# Altium PCB pcb.PcbDoc
Units mm, origin at the board's own origin, x right, y up, seen from the top; angles counter-clockwise.
Board outline 55 x 85 mm, 2 copper layers (Top Layer, Bottom Layer); 31 components, 57 nets, 234 pads, 0 vias.
Unrouted connection lines stored in the file: 116.
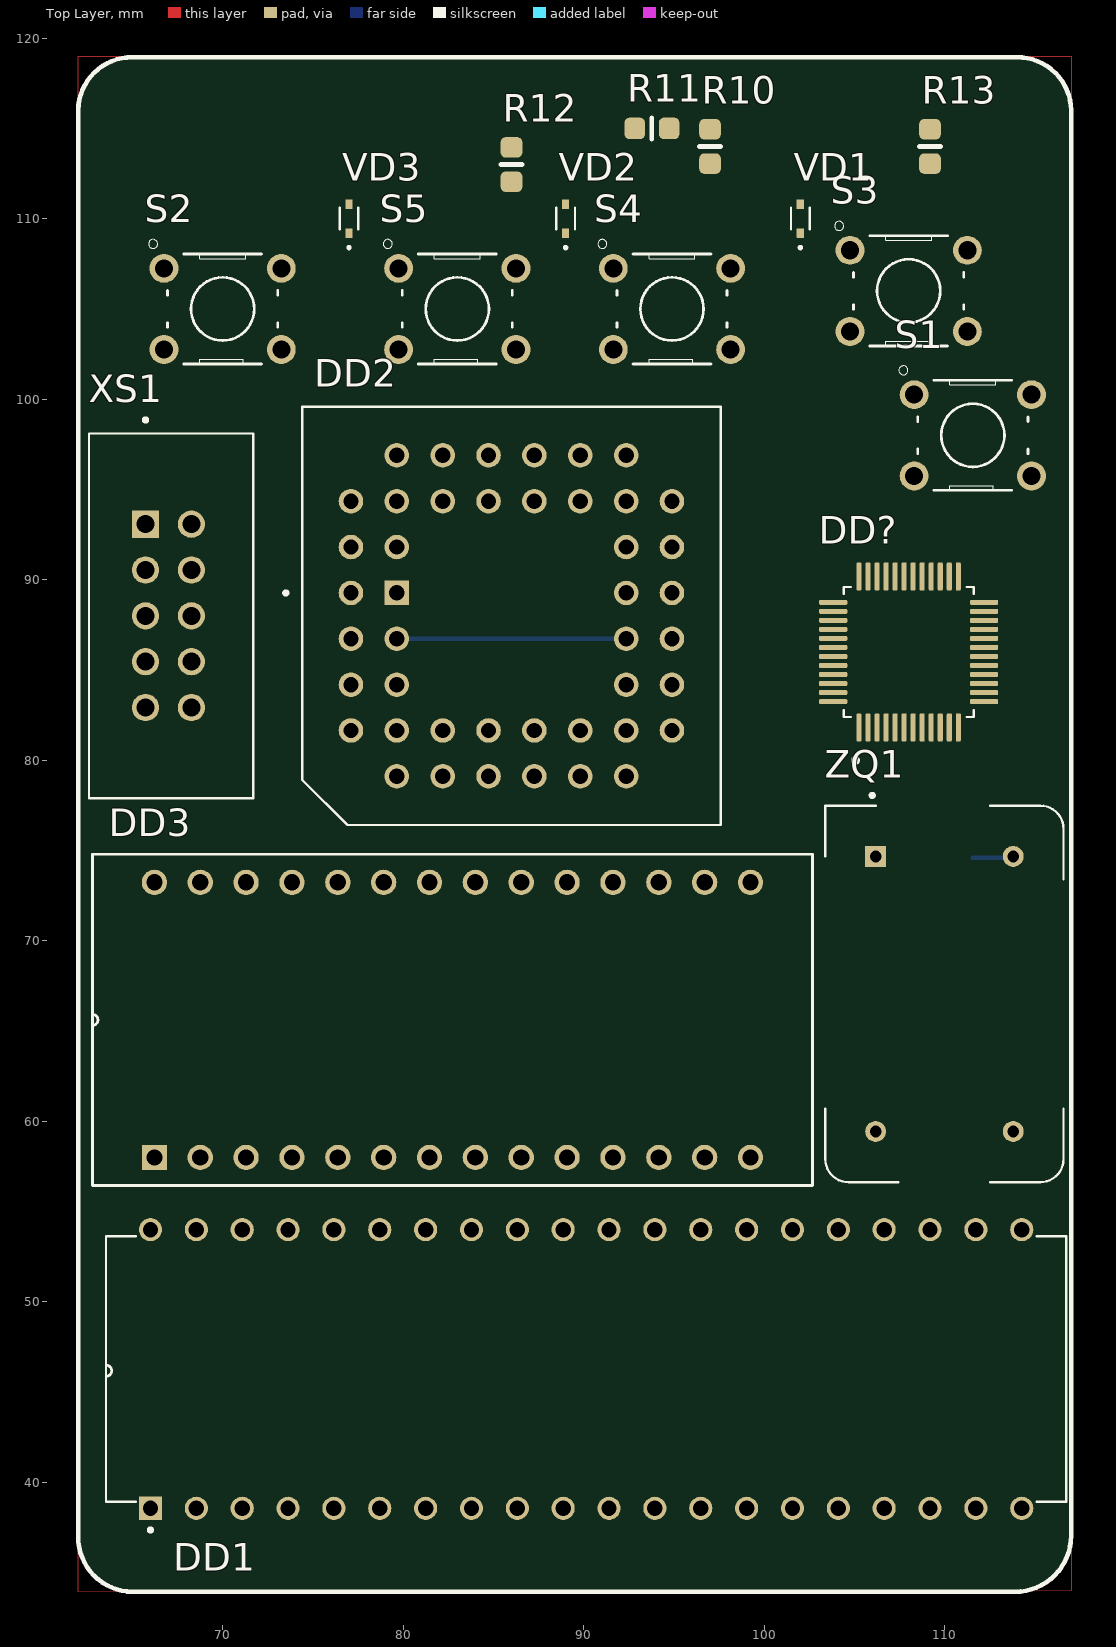
[diagram p0: Top Layer view]
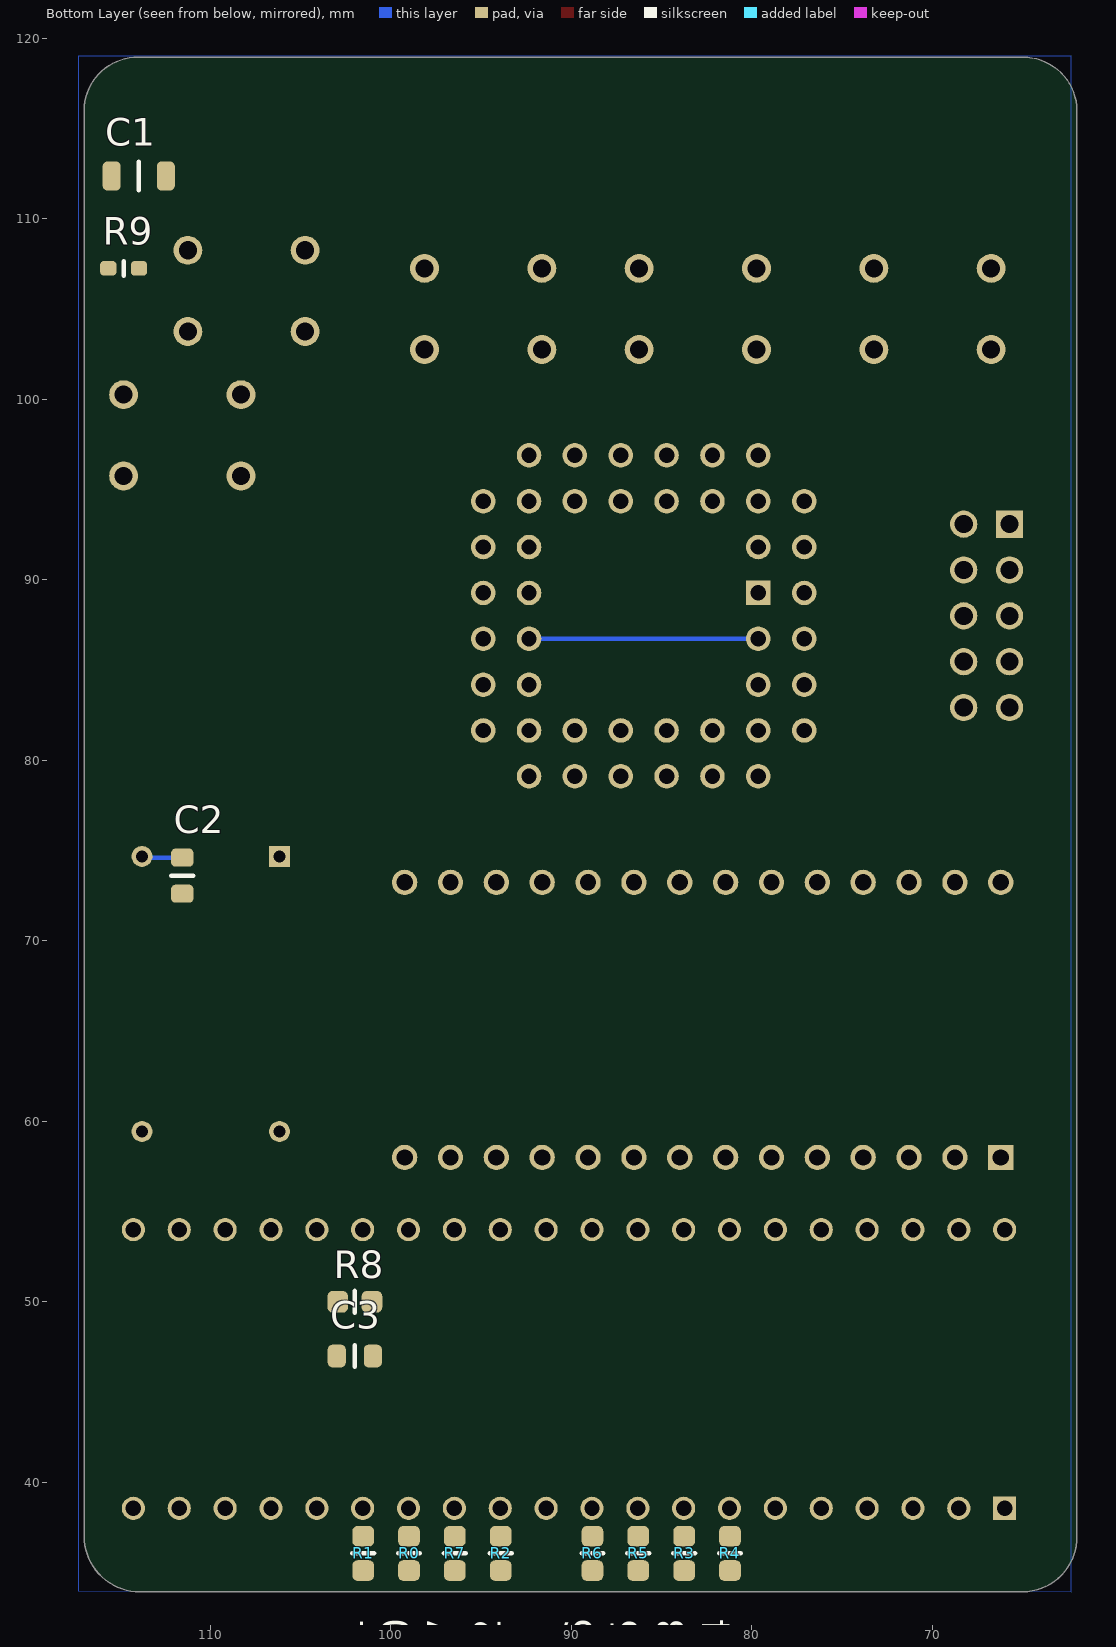
[diagram p1: Bottom Layer view, seen from below]

## Layer stack, top to bottom
Top Solder: solder mask 0.0102, Solder Resist, Dk 3.5
Top Layer: signal copper 0.0356
Dielectric 1: dielectric 0.32, FR-4, Dk 4.8
Bottom Layer: signal copper 0.0356
Bottom Solder: solder mask 0.0102, Solder Resist, Dk 3.5

## Board outline
62,37 ccw(c65.03,36.97) 65,33.94 113.9,33.94 ccw(c113.9,37.037) 116.997,37.037 117,37.04 117,116 ccw(c114.03,115.97) 114,118.94 65,118.94 ccw(c64.97,115.97) 62,116

## Design rules (kind name [scope] priority, off if disabled: settings)
Clearance [All] p1: gap=0.254 ignorepadtopadclearanceinfootprint=FALSE except(0: Arc-Hole Track-Hole SMDPad-Hole THPad-Hole Via-Hole Fill-Hole Poly-Hole Region-Hole Text-Hole)
PolygonConnect [All] p1: connectstyle=Relief reliefconductorwidth=0.254 reliefentries=4 polygonreliefangle="90 Angle" airgapwidth=0.254
RoomDefinition main [InComponentClass('main')] p1: confinementstyle=ConfineIn formatcopy=TRUE lockcomponents=FALSE outline 62,33.94 117,33.94 117,118.94 62,118.94
RoutingVias [All] p1: holewidth=0.711 width=1.27 viastyle="Through Hole" minholewidth=0.711 minwidth=1.27 maxholewidth=0.711 maxwidth=1.27
SolderMaskExpansion [All] p1: expansion=0.102
Width [All] p1: maxlimit=0.254 minlimit=0.254 preferedwidth=0.254
30 further rules are at their usual default settings.

## Components (designator, comment, footprint, x,y, rotation, side; value= is the part's Value field where it differs from the comment)
C1 "22uF" Ñ1206 113.969,112.364 r180 bottom
C2 "10uF" C0805 111.557,73.609 r270 bottom
C3 "10uF" C0805 102,47 r0 bottom
DD1 "Z80" DIP1540W47P254L5320H635Q40B 90.134,46.283 r90 top
DD2 "EPM3032ALC44" PLCC-44-R 86,88 r90 top
DD3 "M48Z35Y-70PC1" DIP254P1524X965-28 99.24,73.24 r90 top
DD? "STM32F103C8T6" QFP50P900X900X160-48N 108,86 r90 top
R0 "4.7K" R0805 98.998,36.068 r270 bottom
R1 "4.7K" R0805 101.538,36.068 r270 bottom
R2 "4.7K" R0805 93.918,36.068 r270 bottom
R3 "4.7K" R0805 83.758,36.068 r270 bottom
R4 "4.7K" R0805 81.218,36.068 r270 bottom
R5 "4.7K" R0805 86.298,36.068 r270 bottom
R6 "4.7K" R0805 88.838,36.068 r270 bottom
R7 "4.7K" R0805 96.458,36.068 r270 bottom
R8 "4.7K" R0805 102,50 r0 bottom
R9 "10" R0603 114.807,107.25 r180 bottom
R10 "4.7K" R0805 97,114 r90 top
R11 "4.7K" R0805 93.78,115 r0 top
R12 "4.7K" R0805 86,113 r90 top
R13 "4.7K" R0805 109.184,114 r90 top
S1 "B3F-1000" SW_B3F-1000 111.557,98 r0 top value="10uF X7R 5%"
S2 "B3F-1000" SW_B3F-1000 70,105 r0 top value="10uF X7R 5%"
S3 "B3F-1000" SW_B3F-1000 108,106 r0 top value="10uF X7R 5%"
S4 "B3F-1000" SW_B3F-1000 94.89,105 r0 top value="10uF X7R 5%"
S5 "B3F-1000" SW_B3F-1000 83,105 r0 top value="10uF X7R 5%"
VD1 "1N4148W" SODFL1608X70N 102,110 r90 top
VD2 "1N4148W" SODFL1608X70N 89,110 r90 top
VD3 "1N4148W" SODFL1608X70N 77,110 r90 top
XS1 "BH-10" BH-10 67,88 r270 top
ZQ1 "24MHz" OSC_ECS-100A-240 109.982,67.056 r270 top

## Footprints (in the part's own frame and the unit in brackets; to place one, negate y for a bottom-side part, rotate by r counter-clockwise, add the part's x,y. Pads: shape width x height; smd on the part's side, far side on the other; paste and mask are expansions set on the pad)
BH-10 [mm]
  rect 1.508x1.508 / inner round 1.508 / far side rect 1.508x1.508 hole 1: 1(-5.08,-1.27)
  round 1.508 hole 1: 2(-5.08,1.27) 3(-2.54,-1.27) 4(-2.54,1.27) 5(0,-1.27) 6(0,1.27) 7(2.54,-1.27) 8(2.54,1.27) 9(5.08,-1.27) 10(5.08,1.27)
  silkscreen extent -10.95,-4.4 10.1,4.7, body extent -10.1,-4.39 10.1,4.7, height 9.09
C0805 [mm] "Chip_Capasitor_0805"
  rrect50% 1x1.25 smd mask+0.102: 1(-1,0) 2(1,0)
  silkscreen extent 0,-0.6 0,0.6, body extent -1,-0.64 1,0.64, height 1.35
DIP254P1524X965-28 [mm]
  rect 1.4x1.4 hole 0.9: 1(-15.24,33.02)
  round 1.4 hole 0.9: 2(-15.24,30.48) 3(-15.24,27.94) 4(-15.24,25.4) 5(-15.24,22.86) 6(-15.24,20.32) 7(-15.24,17.78) 8(-15.24,15.24) 9(-15.24,12.7) 10(-15.24,10.16) 11(-15.24,7.62) 12(-15.24,5.08) 13(-15.24,2.54) 14(-15.24,0) 15(0,0) 16(0,2.54) 17(0,5.08) 18(0,7.62) 19(0,10.16) 20(0,12.7) 21(0,15.24) 22(0,17.78) 23(0,20.32) 24(0,22.86) 25(0,25.4) 26(0,27.94) 27(0,30.48) 28(0,33.02)
  silkscreen extent -16.79,-3.43 1.55,36.45, body extent -16.61,-3.33 1.47,36.3, height 14.65
DIP1540W47P254L5320H635Q40B [mm]
  rect 1.28x1.28 hole 0.85: 1(-7.718,24.13)
  round 1.28 hole 0.85: 2(-7.718,21.59) 3(-7.718,19.05) 4(-7.718,16.51) 5(-7.718,13.97) 6(-7.718,11.43) 7(-7.718,8.89) 8(-7.718,6.35) 9(-7.718,3.81) 10(-7.718,1.27) 11(-7.718,-1.27) 12(-7.718,-3.81) 13(-7.718,-6.35) 14(-7.718,-8.89) 15(-7.718,-11.43) 16(-7.718,-13.97) 17(-7.718,-16.51) 18(-7.718,-19.05) 19(-7.718,-21.59) 20(-7.718,-24.13) 21(7.718,-24.13) 22(7.718,-21.59) 23(7.718,-19.05) 24(7.718,-16.51) 25(7.718,-13.97) 26(7.718,-11.43) 27(7.718,-8.89) 28(7.718,-6.35) 29(7.718,-3.81) 30(7.718,-1.27) 31(7.718,1.27) 32(7.718,3.81) 33(7.718,6.35) 34(7.718,8.89) 35(7.718,11.43) 36(7.718,13.97) 37(7.718,16.51) 38(7.718,19.05) 39(7.718,21.59) 40(7.718,24.13)
  silkscreen extent -9.02,-26.6 7.35,26.6, body extent -8.85,-26.2 8.85,26.2, height 9.06
OSC_ECS-100A-240 [mm]
  rect 1.158x1.158 hole 0.65: 1(-7.62,-3.81)
  round 1.158 hole 0.65: 7(7.62,-3.81) 8(7.62,3.81) 14(-7.62,3.81)
  silkscreen extent -11.1,-6.6 10.43,6.6, body extent -10.38,-6.6 10.48,6.6, height 6.08
PLCC-44-R [mm]
  rect 1.358x1.358 hole 0.85: 1(1.27,6.35)
  round 1.358 hole 0.85: 2(-1.27,8.89) 3(-1.27,6.35) 4(-3.81,8.89) 5(-3.81,6.35) 6(-6.35,8.89) 7(-8.89,6.35) 8(-6.35,6.35) 9(-8.89,3.81) 10(-6.35,3.81) 11(-8.89,1.27) 12(-6.35,1.27) 13(-8.89,-1.27) 14(-6.35,-1.27) 15(-8.89,-3.81) 16(-6.35,-3.81) 17(-8.89,-6.35) 18(-6.35,-8.89) 19(-6.35,-6.35) 20(-3.81,-8.89) 21(-3.81,-6.35) 22(-1.27,-8.89) 23(-1.27,-6.35) 24(1.27,-8.89) 25(1.27,-6.35) 26(3.81,-8.89) 27(3.81,-6.35) 28(6.35,-8.89) 29(8.89,-6.35) 30(6.35,-6.35) 31(8.89,-3.81) 32(6.35,-3.81) 33(8.89,-1.27) 34(6.35,-1.27) 35(8.89,1.27) 36(6.35,1.27) 37(8.89,3.81) 38(6.35,3.81) 39(8.89,6.35) 40(6.35,8.89) 41(6.35,6.35) 42(3.81,8.89) 43(3.81,6.35) 44(1.27,8.89)
  silkscreen extent -11.59,-11.59 11.59,12.6, body extent -11.74,-11.74 11.74,11.74, height 8.31
QFP50P900X900X160-48N [mm]
  rrect50% 1.56x0.28 smd: 1(-4.18,2.75) 2(-4.18,2.25) 3(-4.18,1.75) 4(-4.18,1.25) 5(-4.18,0.75) 6(-4.18,0.25) 7(-4.18,-0.25) 8(-4.18,-0.75) 9(-4.18,-1.25) 10(-4.18,-1.75) 11(-4.18,-2.25) 12(-4.18,-2.75) 25(4.18,-2.75) 26(4.18,-2.25) 27(4.18,-1.75) 28(4.18,-1.25) 29(4.18,-0.75) 30(4.18,-0.25) 31(4.18,0.25) 32(4.18,0.75) 33(4.18,1.25) 34(4.18,1.75) 35(4.18,2.25) 36(4.18,2.75)
  rrect50% 0.28x1.56 smd: 13(-2.75,-4.18) 14(-2.25,-4.18) 15(-1.75,-4.18) 16(-1.25,-4.18) 17(-0.75,-4.18) 18(-0.25,-4.18) 19(0.25,-4.18) 20(0.75,-4.18) 21(1.25,-4.18) 22(1.75,-4.18) 23(2.25,-4.18) 24(2.75,-4.18) 37(2.75,4.18) 38(2.25,4.18) 39(1.75,4.18) 40(1.25,4.18) 41(0.75,4.18) 42(0.25,4.18) 43(-0.25,4.18) 44(-0.75,4.18) 45(-1.25,4.18) 46(-1.75,4.18) 47(-2.25,4.18) 48(-2.75,4.18)
  silkscreen extent -6.15,-3.6 3.6,3.6, body extent -4.5,-4.5 4.5,4.5, height 1.6
R0603 [mm] "Chip_Resistor_0603"
  rrect50% 0.9x0.8 smd mask+0.1: 1(-0.85,0) 2(0.85,0)
  silkscreen extent 0,-0.4 0,0.4, body extent -0.8,-0.4 0.8,0.4, height 0.45
R0805 [mm] "Chip_Resistor_0805"
  rrect50% 1.14x1.2 smd mask+0.1: 1(-0.95,0) 2(0.95,0)
  silkscreen extent 0,-0.6 0,0.6, body extent -1.07,-0.67 1.23,0.68, height 0.76
SODFL1608X70N [mm]
  rrect10% 0.53x0.4 smd: A(0.8,0) C(-0.8,0)
  silkscreen extent -1.65,-0.52 0.6,0.52, body extent -0.8,-0.4 0.8,0.4, height 0.7
SW_B3F-1000 [mm]
  round 1.6 hole 1: 1(-3.25,2.25) 2(3.25,2.25) 3(-3.25,-2.25) 4(3.25,-2.25)
  silkscreen extent -4.1,-3.05 3.05,3.85, body extent -3.85,-3 3.85,3, height 4.3
Ñ1206 [mm] "Chip_Capasitor_1206"
  rrect50% 1x1.6 smd mask+0.102: 1(-1.5,0) 2(1.5,0)
  silkscreen extent 0,-0.8 0,0.8, body extent -1.6,-0.81 1.6,0.81, height 1.11

## Part data
C1 C2 C3: library part CapCer
DD2: "44-Pin PLCC44"
DD3: "NVSRAM (Non-Volatile SRAM) Memory IC 256Kb (32K x 8) Parallel 70ns 28-PCDIP, CAPHATA®", Package="DIP-28 STMicroelectronics", Availability=Warning, MF=STMicroelectronics, MP=M48Z35Y-70PC1, Price=None, Purchase-URL=https://pricing.snapeda.com/search/part/M48Z35Y-70PC1/?ref=eda, SnapEDA_Link=https://www.snapeda.com/parts/M48Z35Y-70PC1/STMicroelectronics/view-part/44967/?ref=snap
DD?: "ARMA® CortexA®-M3 STM32F1 Microcontroller IC 32-Bit 72MHz 64KB (64K x 8) FLASH 48-LQFP (7x7)", Package="LQFP-48 STMicroelectronics", Availability="In Stock", Check_prices=https://www.snapeda.com/parts/STM32F103C8T6/STMicroelectronics/view-part/?ref=eda, MF=STMicroelectronics, MP=STM32F103C8T6, Price=None, Purchase-URL=https://pricing.snapeda.com/search/part/STM32F103C8T6/?ref=eda, SnapEDA_Link=https://www.snapeda.com/parts/STM32F103C8T6/STMicroelectronics/view-part/?ref=snap
R0 R1 R2 R3 R4 R5 R6 R7 R8 R9 R10 R11 R12 R13: library part Res
XS1: "10 Position Total Dual Row 2.54 mm Pitch Straight Male Shrouded Box Header", Package=None, Check_prices=https://www.snapeda.com/parts/SBH11-PBPC-D05-ST-BK/Sullins+Connector+Solutions/view-part/?ref=eda, MF="Sullins Connector", MP=SBH11-PBPC-D05-ST-BK, SnapEDA_Link=https://www.snapeda.com/parts/SBH11-PBPC-D05-ST-BK/Sullins+Connector+Solutions/view-part/?ref=snap
ZQ1: library part ECS-100A-240, "Oscillator  14-DIP, 4 Leads (Full Size, Metal Can)", Package=None, Availability=Unavailable, MP=ECS-100A-240, Price=None
S1 S2 S3 S4 S5: ChipDip PN=8001787102, Platan PN=2011347247

## Nets (pads, with @x,y where several pads share a name; then routed paths per layer and width w, separated by ;. In a path a pad name is that pad's centre, name@x,y a point inside that pad or via, vN(x,y) a via of type N, cw(c..) or ccw(c..) an arc to the next point about the centre after c; other vN are vias at no path point)
24M: DD2.43 ZQ1.8
+5V: C2.1 DD1.11 DD3.28 R0.2 R1.2 R2.2 R3.2 R4.2 R5.2 R6.2 R7.2 R8.2 R10.2 R11.2 R12.2 R13.2 ZQ1.14 | length 2.3
  Bottom Layer w0.254: C2.1 111.645,74.609 111.649,74.604 113.72,74.604 ZQ1.14
A0: DD1.30 DD2.5 DD3.10 DD?.18
A1: DD1.31 DD2.4 DD3.9 DD?.19
A2: DD1.32 DD2.2 DD3.8 DD?.20
A3: DD1.33 DD2.44 DD3.7 DD?.39
A4: DD1.34 DD3.6 DD?.40
A5: DD1.35 DD3.5 DD?.41
A6: DD1.36 DD3.4 DD?.42
A7: DD1.37 DD3.3 DD?.43
A8: DD1.38 DD3.25 DD?.45
A9: DD1.39 DD3.24 DD?.46
A10: DD1.40 DD3.21 DD?.21
A11: DD1.1 DD3.23 DD?.22
A12: DD1.2 DD3.2 DD?.25
A13: DD1.3 DD3.26 DD?.26
A14: DD1.4 DD3.1 DD?.27
A15: DD?.28
BSRQ: DD1.25
BUSA: DD1.23
CLK: DD1.6 DD2.6
CPLDP: DD2.3 DD2.15 DD2.23 DD2.35 XS1.4 | length 12.7
  Bottom Layer w0.254: DD2.3 DD2.23
D0: DD1.14 DD2.14 DD3.11 DD?.10 R0.1 VD1.A
D1: DD1.15 DD2.29 DD3.12 DD?.11 R1.1 VD2.A
D2: DD1.12 DD2.18 DD3.13 DD?.12 R2.1 VD3.A
D3: DD1.8 DD2.20 DD3.15 DD?.13 R3.1
D4: DD1.7 DD2.21 DD3.16 DD?.14 R4.1
D5: DD1.9 DD2.19 DD3.17 DD?.15 R5.1
D6: DD1.10 DD2.16 DD3.18 DD?.16 R6.1
D7: DD1.13 DD2.12 DD3.19 DD?.17 R7.1
D+: DD?.33
D-: DD?.32
FFSH: DD1.28
GND: C2.2 C3.2 DD1.29 DD2.10 DD2.22 DD2.30 DD2.42 DD3.14 S1.4 S2.4 XS1.2 XS1.10 ZQ1.7
HLT: DD1.18 R13.1
INT: DD1.16 R12.1 S2.1
IORQ: DD1.20 DD2.26
KBD: DD2.37 S3.4 S4.4 S5.4
LCD_E: DD2.39
LCD_RS: DD2.40
LCD_RW: DD2.41
M1: DD1.27 DD2.25
MREQ: DD1.19 DD2.24 DD3.20
NetS3_1: S3.1 VD1.C
NetS4_1: S4.1 VD2.C
NetS5_1: S5.1 VD3.C
NMI: DD1.17 R11.1
RD: DD1.21 DD2.28 DD3.22
RES: C3.1 DD1.26 DD2.1 R8.1 S1.1
SCLK: DD?.37
SDIO: DD?.34
TCK: DD2.32 XS1.1
TDI: DD2.7 XS1.9
TDO: DD2.38 XS1.3
TMS: DD2.13 XS1.5
WAIT: DD1.24 R10.1
WR: DD1.22 DD2.27 DD3.27
pads on no net: C1.1 C1.2 DD1.5 DD2.8 DD2.9 DD2.11 DD2.17 DD2.31 DD2.33 DD2.34 DD2.36 DD?.1 DD?.2 DD?.3 DD?.4 DD?.5 DD?.6 DD?.7 DD?.8 DD?.9 DD?.23 DD?.24 DD?.29 DD?.30 DD?.31 DD?.35 DD?.36 DD?.38 DD?.44 DD?.47 DD?.48 R9.1 R9.2 S1.2 S1.3 S2.2 S2.3 S3.2 S3.3 S4.2 S4.3 S5.2 S5.3 XS1.6 XS1.7 XS1.8 ZQ1.1

## Polygon pours and split planes (outlines as drawn)
GND on Top Layer "Top Layer-GND" (solid, shelved, pour order 0): 62,119 117,119 117,34 62,33.94
GND on Bottom Layer "Bottom Layer-GND" (solid, shelved, pour order 2): 62.322,119 117.322,119 117.322,34 62.322,33.94

## Silkscreen, mask and mechanical layers (free items; w line width, h text height)
Top Overlay:
  lines w0.254: 116.997,37.037 cw(c113.9,37.037) 113.9,33.94 65,33.94 cw(c65.03,36.97) 62,37 62,116 cw(c64.97,115.97) 65,118.94 114,118.94 cw(c114.03,115.97) 117,116 117,37.04